# Altium PCB BLE_Keyboard_V2.PcbDoc
Units mm, origin at the board's own origin, x right, y up, seen from the top; angles counter-clockwise.
Board outline 349.66 x 123.83 mm, 2 copper layers (Top Layer, Bottom Layer); 94 components, 42 nets, 468 pads, 0 vias.
Unrouted connection lines stored in the file: 160.
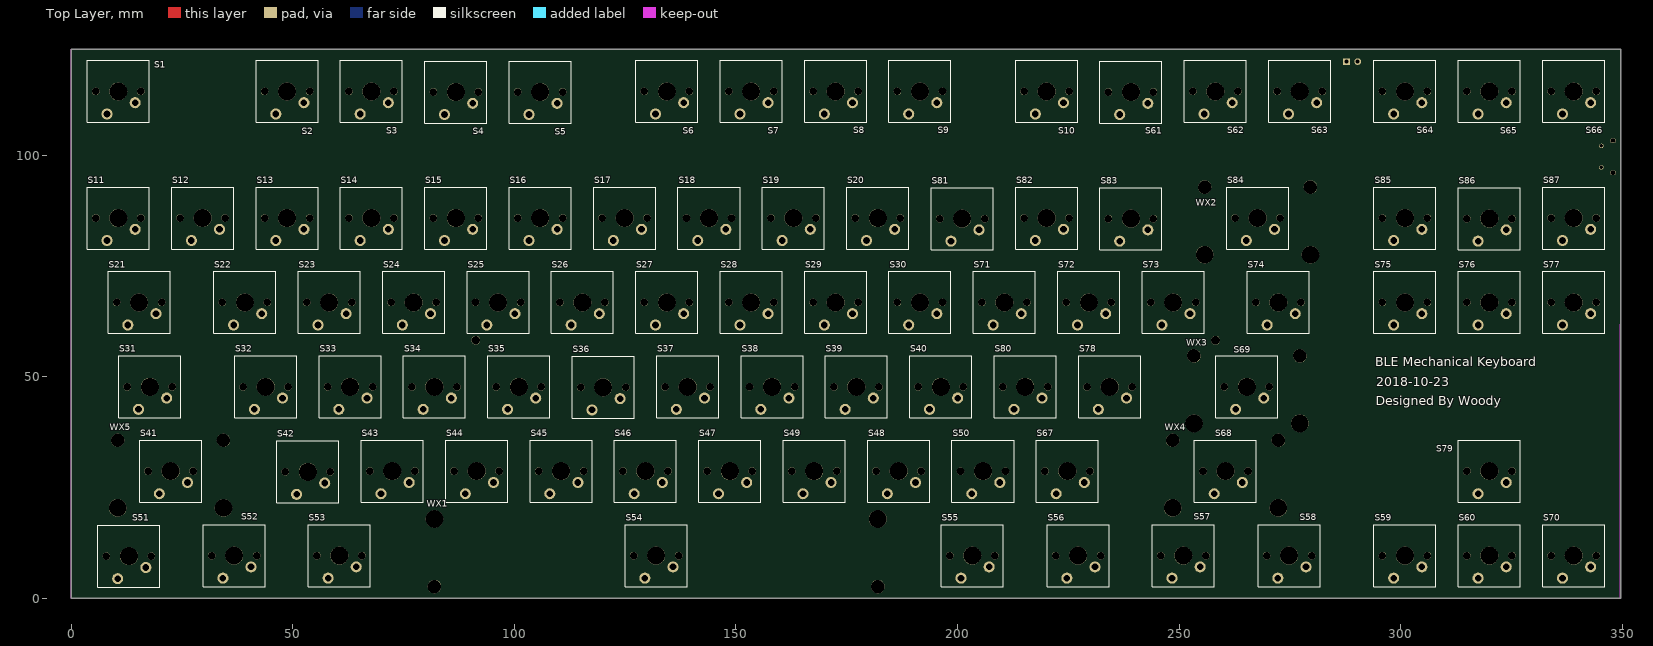
[diagram p0: Top Layer view]
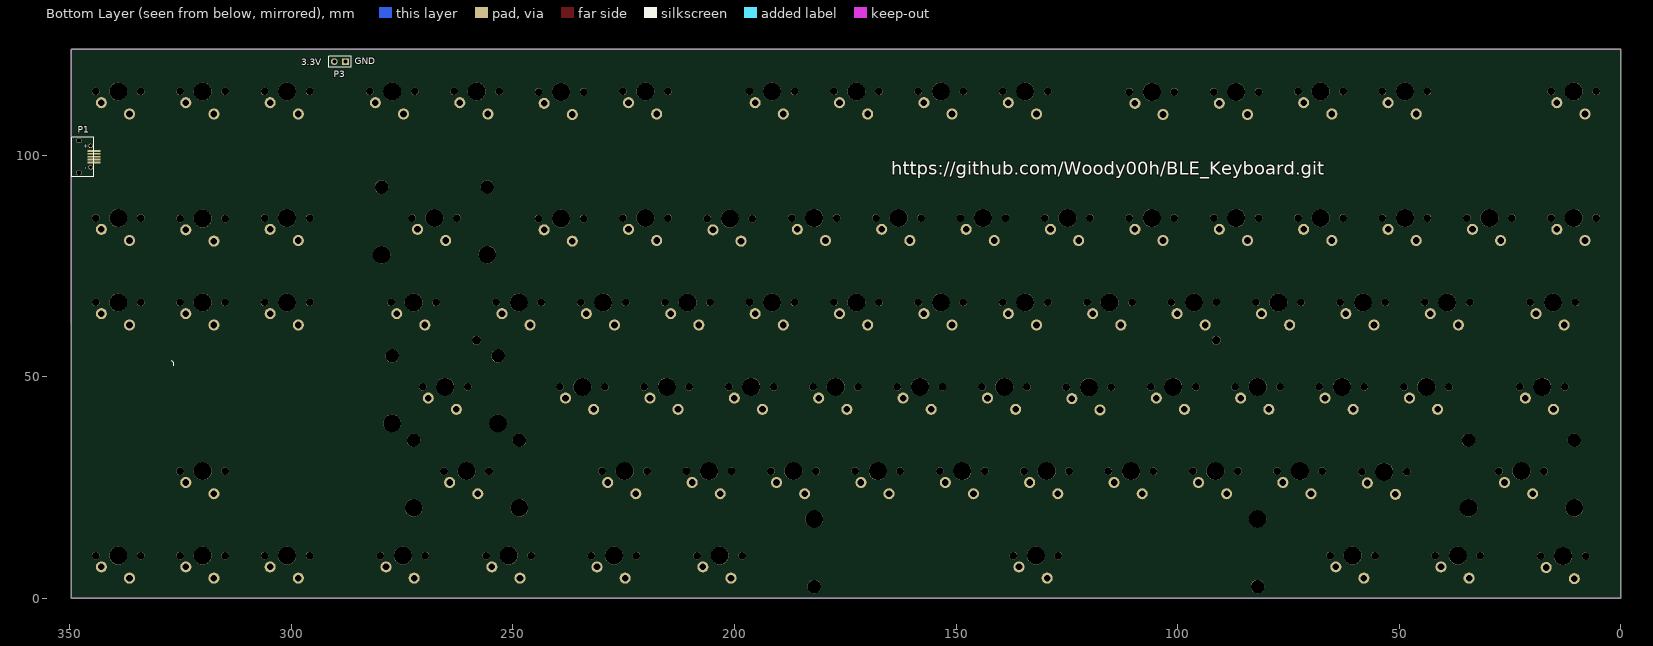
[diagram p1: Bottom Layer view, seen from below]

## Layer stack, top to bottom
Top Solder: solder mask 0.0102, Solder Resist, Dk 3.5
Top Layer: signal copper 0.0356
Dielectric 1: dielectric 0.32, FR-4, Dk 4.8
Bottom Layer: signal copper 0.0356
Bottom Solder: solder mask 0.0102, Solder Resist, Dk 3.5

## Board outline
0,0 0,123.825 349.663,123.825 349.663,0

## Design rules (kind name [scope] priority, off if disabled: settings)
Clearance Antenna3 [InNet('NetC6_1')] p1: gap=0.45
Clearance Antenna2 [InNet('NetC7_1')] p2: gap=0.45
Clearance Antenna [InNet('NetA1_1')] p3: gap=0.45
Clearance [All] p4: gap=0.254
HoleSize [All] p1: absolutevalues=TRUE maxlimit=10.16 minlimit=0.025 maxpercent=80.000 minpercent=20.000
MinimumSolderMaskSliver [All] p1: minsoldermaskwidth=0
PolygonConnect Via [IsVia] p1: connectstyle=Direct reliefconductorwidth=0.254 reliefentries=4 polygonreliefangle="90 Angle" airgapwidth=0.254
PolygonConnect [All] p2: connectstyle=Relief reliefconductorwidth=0.254 reliefentries=4 polygonreliefangle="90 Angle" airgapwidth=0.254
RoutingVias [All] p1: holewidth=0.508 width=1.016 viastyle="Through Hole" minholewidth=0.254 minwidth=0.508 maxholewidth=1.27 maxwidth=2.54
SilkToSilkClearance [All] p1: silktosilkclearance=0
SilkToSolderMaskClearance [IsPad] p1: minsilkscreentomaskgap=0 clearancetoexposedcopper=TRUE
SolderMaskExpansion [All] p1: expansion=0.102
Width [All] p1: maxlimit=2.54 minlimit=0.254 preferedwidth=0.254
26 further rules are at their usual default settings.

## Components (designator, comment, footprint, x,y, rotation, side; value= is the part's Value field where it differs from the comment)
P1 "Micro USB" MICROUSB 345.404,100.927 r90 bottom
P3 "Battery" HDR1X2 287.798,121.078 r0 bottom
S1 "SW-PB" MX_SW-4 10.557,114.347 r0 top
S2 "SW-PB" MX_SW-4 48.657,114.347 r0 top
S3 "SW-PB" MX_SW-4 67.707,114.347 r0 top
S4 "SW-PB" MX_SW-4 86.757,114.22 r0 top
S5 "SW-PB" MX_SW-4 105.807,114.22 r0 top
S6 "SW-PB" MX_SW-4 134.382,114.347 r0 top
S7 "SW-PB" MX_SW-4 153.432,114.347 r0 top
S8 "SW-PB" MX_SW-4 172.482,114.347 r0 top
S9 "SW-PB" MX_SW-4 191.532,114.347 r0 top
S10 "SW-PB" MX_SW-4 220.107,114.347 r0 top
S11 "SW-PB" MX_SW-4 10.557,85.772 r0 top
S12 "SW-PB" MX_SW-4 29.607,85.772 r0 top
S13 "SW-PB" MX_SW-4 48.657,85.772 r0 top
S14 "SW-PB" MX_SW-4 67.707,85.772 r0 top
S15 "SW-PB" MX_SW-4 86.757,85.772 r0 top
S16 "SW-PB" MX_SW-4 105.807,85.772 r0 top
S17 "SW-PB" MX_SW-4 124.857,85.772 r0 top
S18 "SW-PB" MX_SW-4 143.907,85.772 r0 top
S19 "SW-PB" MX_SW-4 162.957,85.772 r0 top
S20 "SW-PB" MX_SW-4 182.007,85.772 r0 top
S21 "SW-PB" MX_SW-4 15.256,66.722 r0 top
S22 "SW-PB" MX_SW-4 39.132,66.722 r0 top
S23 "SW-PB" MX_SW-4 58.182,66.722 r0 top
S24 "SW-PB" MX_SW-4 77.232,66.722 r0 top
S25 "SW-PB" MX_SW-4 96.282,66.722 r0 top
S26 "SW-PB" MX_SW-4 115.332,66.722 r0 top
S27 "SW-PB" MX_SW-4 134.382,66.722 r0 top
S28 "SW-PB" MX_SW-4 153.432,66.722 r0 top
S29 "SW-PB" MX_SW-4 172.482,66.722 r0 top
S30 "SW-PB" MX_SW-4 191.532,66.722 r0 top
S31 "SW-PB" MX_SW-4 17.669,47.672 r0 top
S32 "SW-PB" MX_SW-4 43.831,47.672 r0 top
S33 "SW-PB" MX_SW-4 62.881,47.672 r0 top
S34 "SW-PB" MX_SW-4 81.931,47.672 r0 top
S35 "SW-PB" MX_SW-4 100.981,47.672 r0 top
S36 "SW-PB" MX_SW-4 120.031,47.545 r0 top
S37 "SW-PB" MX_SW-4 139.081,47.672 r0 top
S38 "SW-PB" MX_SW-4 158.131,47.672 r0 top
S39 "SW-PB" MX_SW-4 177.181,47.672 r0 top
S40 "SW-PB" MX_SW-4 196.231,47.672 r0 top
S41 "SW-PB" MX_SW-4 22.368,28.622 r0 top
S42 "SW-PB" MX_SW-4 53.356,28.495 r0 top
S43 "SW-PB" MX_SW-4 72.406,28.622 r0 top
S44 "SW-PB" MX_SW-4 91.456,28.622 r0 top
S45 "SW-PB" MX_SW-4 110.506,28.622 r0 top
S46 "SW-PB" MX_SW-4 129.556,28.622 r0 top
S47 "SW-PB" MX_SW-4 148.606,28.622 r0 top
S48 "SW-PB" MX_SW-4 186.706,28.622 r0 top
S49 "SW-PB" MX_SW-4 167.656,28.622 r0 top
S50 "SW-PB" MX_SW-4 205.756,28.622 r0 top
S51 "SW-PB" MX_SW-4 12.97,9.445 r0 top
S52 "SW-PB" MX_SW-4 36.719,9.572 r0 top
S53 "SW-PB" MX_SW-4 60.468,9.572 r0 top
S54 "SW-PB" MX_SW-4 131.969,9.572 r0 top
S55 "SW-PB" MX_SW-4 203.343,9.572 r0 top
S56 "SW-PB" MX_SW-4 227.219,9.572 r0 top
S57 "SW-PB" MX_SW-4 250.968,9.572 r0 top
S58 "SW-PB" MX_SW-4 274.844,9.572 r0 top
S59 "SW-PB" MX_SW-4 301.006,9.572 r0 top
S60 "SW-PB" MX_SW-4 320.056,9.572 r0 top
S61 "SW-PB" MX_SW-4 239.157,114.22 r0 top
S62 "SW-PB" MX_SW-4 258.207,114.347 r0 top
S63 "SW-PB" MX_SW-4 277.257,114.347 r0 top
S64 "SW-PB" MX_SW-4 301.006,114.347 r0 top
S65 "SW-PB" MX_SW-4 320.056,114.347 r0 top
S66 "SW-PB" MX_SW-4 339.106,114.347 r0 top
S67 "SW-PB" MX_SW-4 224.806,28.622 r0 top
S68 "SW-PB" MX_SW-4 260.493,28.622 r0 top
S69 "SW-PB" MX_SW-4 265.319,47.672 r0 top
S70 "SW-PB" MX_SW-4 339.106,9.572 r0 top
S71 "SW-PB" MX_SW-4 210.582,66.722 r0 top
S72 "SW-PB" MX_SW-4 229.632,66.722 r0 top
S73 "SW-PB" MX_SW-4 248.682,66.722 r0 top
S74 "SW-PB" MX_SW-4 272.431,66.722 r0 top
S75 "SW-PB" MX_SW-4 301.006,66.722 r0 top
S76 "SW-PB" MX_SW-4 320.056,66.722 r0 top
S77 "SW-PB" MX_SW-4 339.106,66.722 r0 top
S78 "SW-PB" MX_SW-4 234.331,47.672 r0 top
S79 "SW-PB" MX_SW-4 320.056,28.622 r0 top
S80 "SW-PB" MX_SW-4 215.281,47.672 r0 top
S81 "SW-PB" MX_SW-4 201.057,85.645 r0 top
S82 "SW-PB" MX_SW-4 220.107,85.772 r0 top
S83 "SW-PB" MX_SW-4 239.157,85.645 r0 top
S84 "SW-PB" MX_SW-4 267.732,85.772 r0 top
S85 "SW-PB" MX_SW-4 301.006,85.772 r0 top
S86 "SW-PB" MX_SW-4 320.056,85.645 r0 top
S87 "SW-PB" MX_SW-4 339.106,85.772 r0 top
WX1 "Comment" 1X6.25 131.969,9.572 r180 top
WX2 "Comment" 1X2 267.732,85.772 r0 top
WX3 "Comment" 1X2 265.319,47.672 r0 top
WX4 "Comment" 1X2 260.493,28.622 r0 top
WX5 "Comment" 1X2 22.368,28.622 r0 top

## Footprints (in the part's own frame and the unit in brackets; to place one, negate y for a bottom-side part, rotate by r counter-clockwise, add the part's x,y. Pads: shape width x height; smd on the part's side, far side on the other; paste and mask are expansions set on the pad)
1X2 [mil] "stab"
  round 120 hole 120: 0(-470,275) 3(470,275)
  round 157 hole 157: 1(-470,-325) 4(470,-325)
1X6.25 [mil] "stab"
  round 120 hole 120: 0(1970,275) 3(-1970,275)
  round 157 hole 157: 1(1970,-325) 4(-1970,-325)
HDR1X2 [mm] "Connector; Header; 2 Position"
  rect 1.5x1.5 hole 0.9: 1(0,0)
  round 1.5 hole 0.9: 2(2.54,0)
  silkscreen extent -1.27,-1.27 3.81,1.27
MICROUSB [mm]
  rect 0.4x3 smd: 1(0,-0.825) 2(-0.65,-0.825) 3(-1.3,-0.825) 4(-1.95,-0.825) 5(-2.6,-0.825)
  round 1 hole 0.8: 6(-3.725,-0.075) 7(1.125,-0.075)
  oval 1x1.3 hole 0.8 slot 1.1 at 90 deg: 8(-4.925,2.575) 9(2.325,2.575)
  silkscreen extent -5.77,-0.76 3.12,4.24
MX_SW-4 [mil] "with Fixation pins  1-Pole"
  round 98.43 hole 59.06: 1(150,-100) 2(-100,-200)
  round 67 hole 67: ""(-200,0) ""(200,0)
  round 160 hole 160: ""(0,0)
  silkscreen extent -276,-276 276,276

## Part data
P1: library part MHDR1X5, "Header, 5-Pin"
P3: library part "Header 2", "Header, 2-Pin"
S1 S2 S3 S4 S5 S6 S7 S8 S9 S10 S11 S12 S13 S14 S15 S16 S17 S18 S19 S20 S21 S22 S23 S24 S25 S26 S27 S28 S29 S30 S31 S32 S33 S34 S35 S36 S37 S38 S39 S40 S41 S42 S43 S44 S45 S46 S47 S48 S49 S50 S51 S52 S53 S54 S55 S56 S57 S58 S59 S60 S61 S62 S63 S64 S65 S66 S67 S68 S69 S70 S71 S72 S73 S74 S75 S76 S77 S78 S79 S80 S81 S82 S83 S84 S85 S86 S87: "Switch"

## Free pads (board coordinates)
  round 2 hole 2: 3(91.25,58.176) 4(258.25,58.176)

## Nets (pads, with @x,y where several pads share a name; then routed paths per layer and width w, separated by ;. In a path a pad name is that pad's centre, name@x,y a point inside that pad or via, vN(x,y) a via of type N, cw(c..) or ccw(c..) an arc to the next point about the centre after c; other vN are vias at no path point)
AVDD: 
Col1: S1.2 S11.2 S21.2 S31.2 S41.2 S51.2 S61.2 S71.2 S81.2
Col2: S2.2 S12.2 S22.2 S32.2 S42.2 S52.2 S62.2 S72.2 S82.2
Col3: S3.2 S13.2 S23.2 S33.2 S43.2 S53.2 S63.2 S73.2 S83.2
Col4: S4.2 S14.2 S24.2 S34.2 S44.2 S54.2 S64.2 S74.2 S84.2
Col5: S5.2 S15.2 S25.2 S35.2 S45.2 S55.2 S65.2 S75.2 S85.2
Col6: S6.2 S16.2 S26.2 S36.2 S46.2 S56.2 S66.2 S76.2 S86.2
Col7: S7.2 S17.2 S27.2 S37.2 S47.2 S57.2 S67.2 S77.2 S87.2
Col8: S8.2 S18.2 S28.2 S38.2 S49.2 S59.2 S69.2 S79.2
Col9: S9.2 S19.2 S29.2 S39.2 S48.2 S58.2 S68.2 S78.2
Col10: S10.2 S20.2 S30.2 S40.2 S50.2 S60.2 S70.2 S80.2
DVDD: 
GND: P1.5 P1.6 P1.7 P1.8 P1.9 P3.1
LED1: 
LED2: 
LED3: 
NetA1_1: 
NetC1_1: 
NetC2_1: 
NetC3_1: 
NetC4_2: 
NetC5_1: 
NetC6_1: 
NetC7_1: 
NetC9_1: P3.2
NetD1_2: 
NetD2_2: 
NetD3_2: 
NetL3_1: 
Row1: S1.1 S2.1 S3.1 S4.1 S5.1 S6.1 S7.1 S8.1 S9.1 S10.1
Row2: S11.1 S12.1 S13.1 S14.1 S15.1 S16.1 S17.1 S18.1 S19.1 S20.1
Row3: S21.1 S22.1 S23.1 S24.1 S25.1 S26.1 S27.1 S28.1 S29.1 S30.1
Row4: S31.1 S32.1 S33.1 S34.1 S35.1 S36.1 S37.1 S38.1 S39.1 S40.1
Row5: S41.1 S42.1 S43.1 S44.1 S45.1 S46.1 S47.1 S48.1 S49.1 S50.1
Row6: S51.1 S52.1 S53.1 S54.1 S55.1 S56.1 S57.1 S58.1 S59.1 S60.1
Row7: S61.1 S62.1 S63.1 S64.1 S65.1 S66.1 S67.1 S68.1 S69.1 S70.1
Row8: S71.1 S72.1 S73.1 S74.1 S75.1 S76.1 S77.1 S78.1 S79.1 S80.1
Row9: S81.1 S82.1 S83.1 S84.1 S85.1 S86.1 S87.1
SWS: 
USB_DM: P1.2
USB_DP: P1.3
VBUS: P1.1
pads on no net: P1.4 S1. S2. S3. S4. S5. S6. S7. S8. S9. S10. S11. S12. S13. S14. S15. S16. S17. S18. S19. S20. S21. S22. S23. S24. S25. S26. S27. S28. S29. S30. S31. S32. S33. S34. S35. S36. S37. S38. S39. S40. S41. S42. S43. S44. S45. S46. S47. S48. S49. S50. S51. S52. S53. S54. S55. S56. S57. S58. S59. S60. S61. S62. S63. S64. S65. S66. S67. S68. S69. S70. S71. S72. S73. S74. S75. S76. S77. S78. S79. S80. S81. S82. S83. S84. S85. S86. S87. WX1.0 WX1.1 WX1.3 WX1.4 WX2.0 WX2.1 WX2.3 WX2.4 WX3.0 WX3.1 WX3.3 WX3.4 WX4.0 WX4.1 WX4.3 WX4.4 WX5.0 WX5.1 WX5.3 WX5.4

## Keep-outs
Keep-Out Layer:
  lines w0.254: 349.647,123.825 0,123.825 0,0 349.647,0 349.663,123.825

## Other copper
Top Layer:
  pour cut-out: 342.179,16.557 349.647,16.557 349.647,62.15 342.179,62.15
  pour cut-out: 349.647,67.865 346.091,67.865 346.091,62.15 349.647,62.15
Bottom Layer:
  pour cut-out: 342.189,16.557 349.647,16.557 349.647,62.15 342.189,62.15
  pour cut-out: 349.647,67.865 346.091,67.865 346.091,62.15 349.647,62.15

## Silkscreen, mask and mechanical layers (free items; w line width, h text height)
Top Overlay:
  text "BLE Mechanical Keyboard" at 294.259,52.324 h2.03
  text "2018-10-23" at 294.513,47.752 h2.03
  text "Designed By Woody" at 294.386,43.561 h2.03
Bottom Overlay:
  lines w0.254: 326.603,52.445 326.603,53.076 327.041,53.514
  text "GND" at 285.766,120.443 h1.52
  text "3.3V" at 297.831,120.316 h1.52
  text "https://github.com/Woody00h/BLE_Keyboard.git" at 164.592,95.504 h3
Mechanical 1:
  drawing of 557 lines, arcs and shapes, not listed

## Text inside footprints (layer, text, board x,y; h text height)
P1: Bottom Overlay "-" at 346.039,96.736 h1.02 r270; Bottom Overlay "+" at 346.039,101.435 h1.02 r270